# Altium PCB PowerBoard.PcbDoc
Units mm, origin at the board's own origin, x right, y up, seen from the top; angles counter-clockwise.
Board outline 27.18 x 30.35 mm, 2 copper layers (Top Layer, Bottom Layer); 15 components, 9 nets, 30 pads, 2 vias.
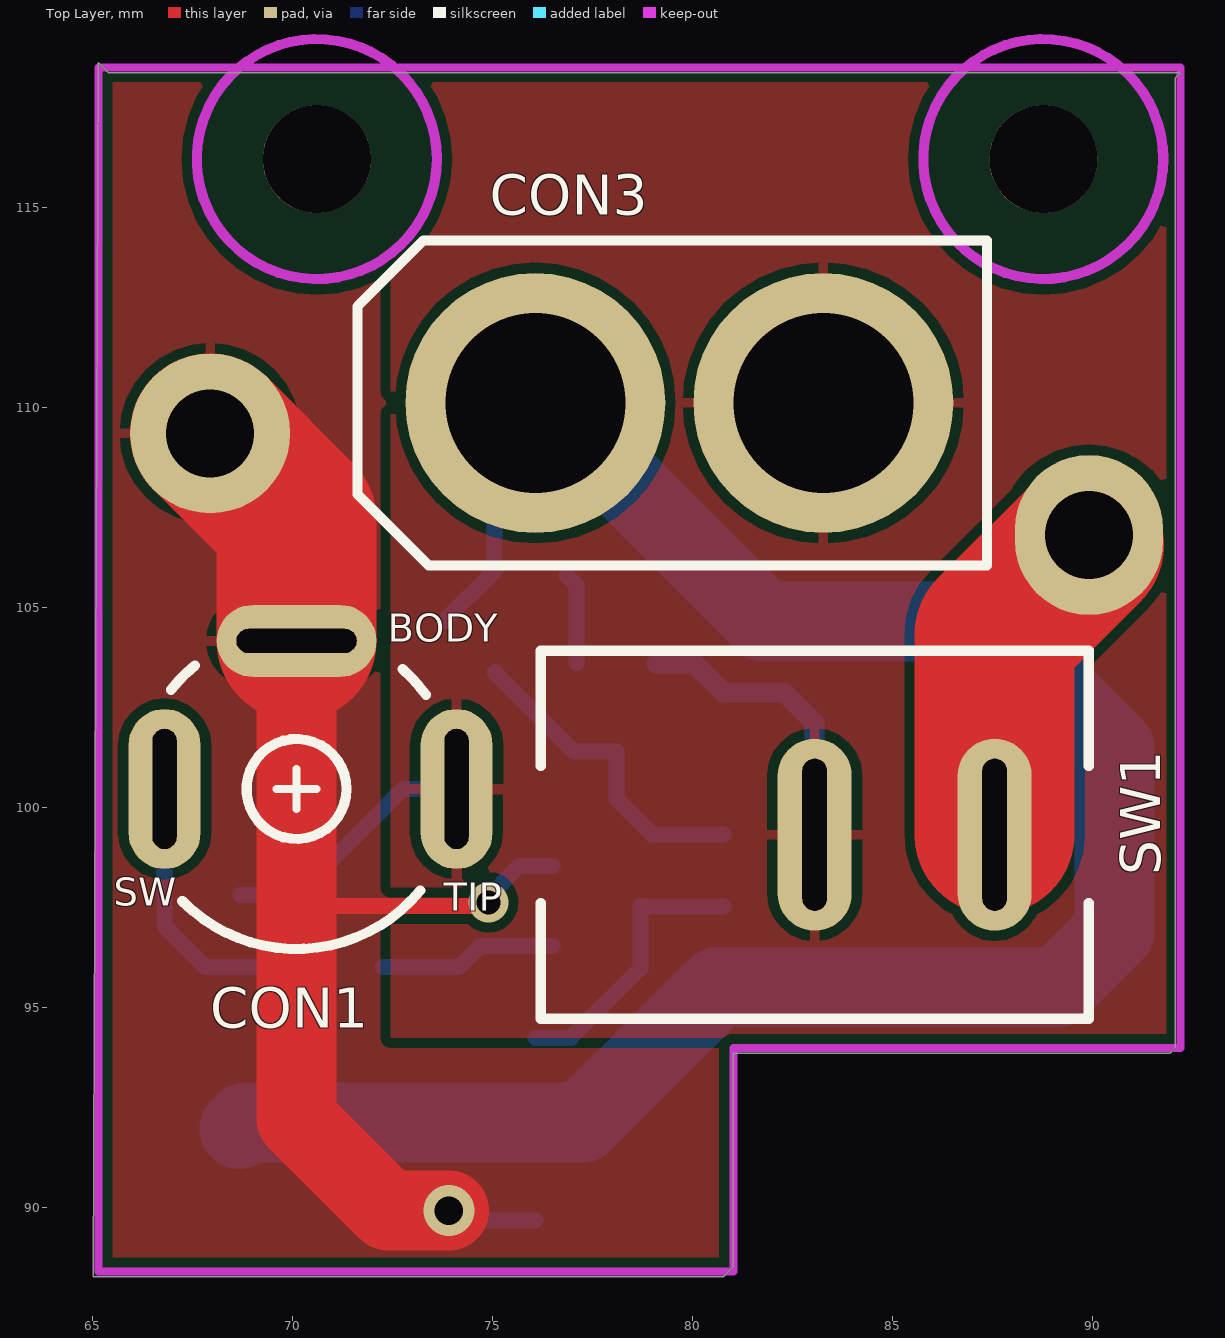
[diagram p0: Top Layer view]
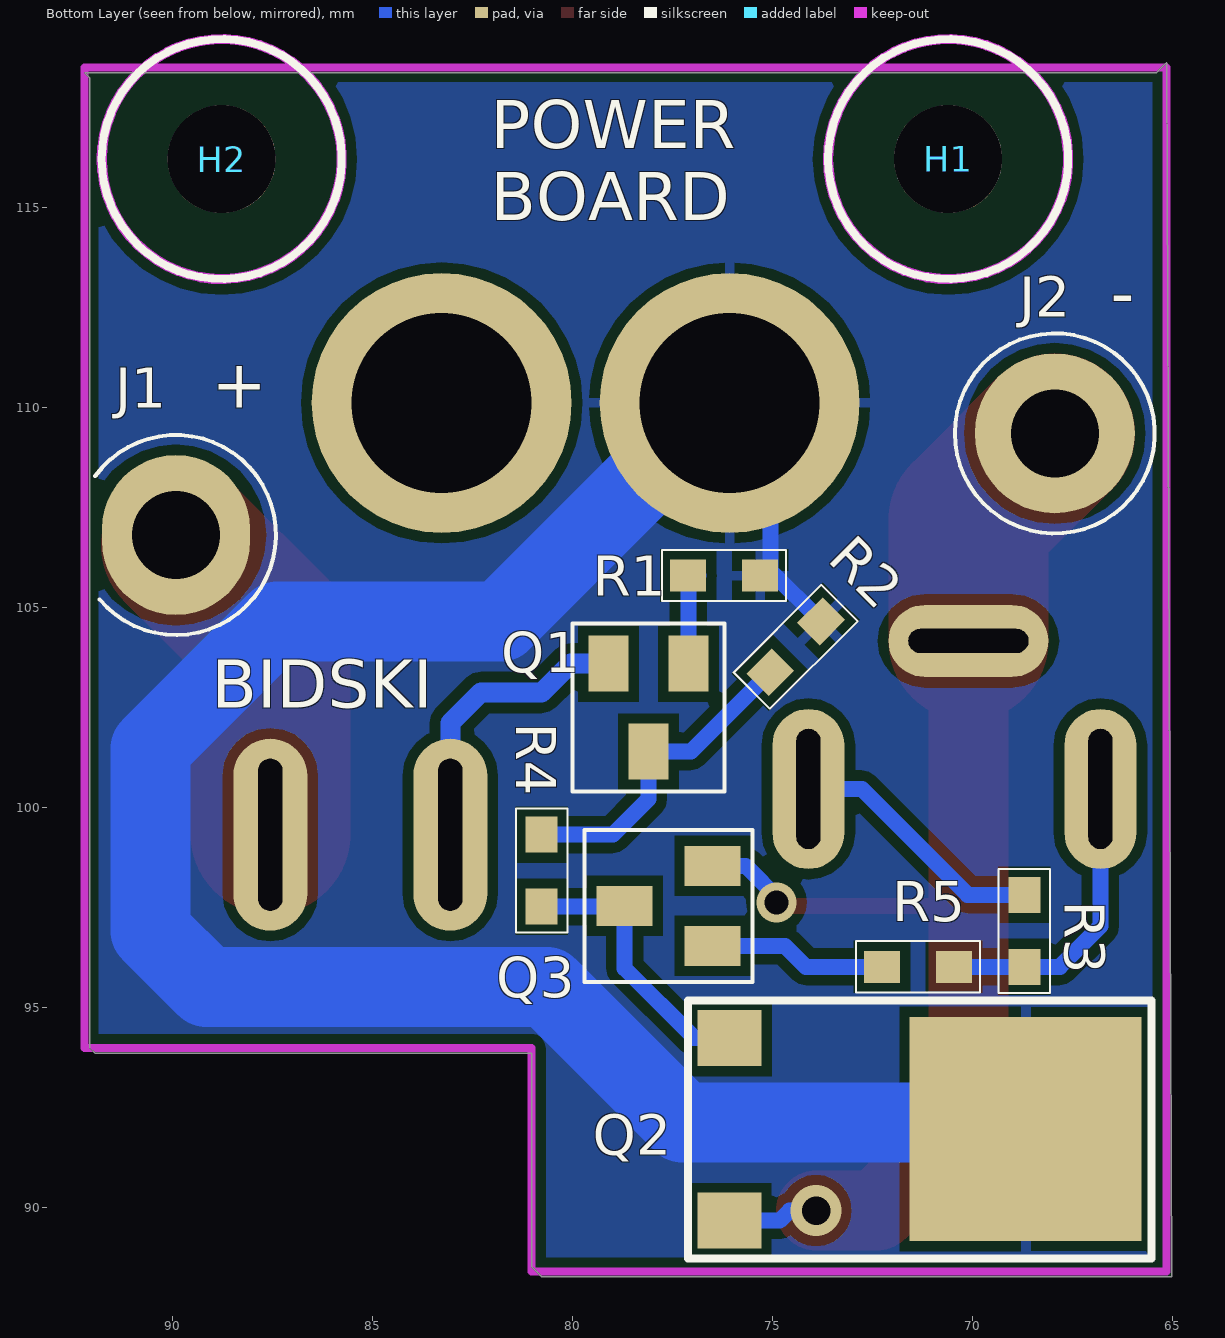
[diagram p1: Bottom Layer view, seen from below]

## Layer stack, top to bottom
Top Solder: solder mask 0.0102, Solder Resist, Dk 3.5
Top Layer: signal copper 0.0356
Dielectric 1: dielectric 0.32, FR-4, Dk 4.8
Bottom Layer: signal copper 0.0356
Bottom Solder: solder mask 0.0102, Solder Resist, Dk 3.5

## Board outline
65.151,118.618 65.405,118.364 92.202,118.364 92.075,118.237 92.075,93.98 91.948,93.853 81.026,93.853 81.026,88.519 80.772,88.265 65.024,88.265

## Design rules (kind name [scope] priority, off if disabled: settings)
Clearance [All] p1: gap=0.254
ComponentClearance [All] p1: gap=0.254 collisioncheckmode=3 verticalgap=0.254 showdistances=TRUE
HoleSize [All] p1: absolutevalues=TRUE maxlimit=5.08 minlimit=0.025 maxpercent=80.000 minpercent=20.000
PolygonConnect [All] p1: connectstyle=Relief reliefconductorwidth=0.254 reliefentries=4 polygonreliefangle="90 Angle" airgapwidth=0.254
RoutingVias [All] p1: holewidth=0.711 width=1.27 viastyle="Through Hole" minholewidth=0.711 minwidth=1.27 maxholewidth=0.711 maxwidth=1.27
SMDNeckDown VDDNeckDown [InNet('VDD')] p1: percent=50.000
SMDNeckDown GNDNeckDown [InNet('GND')] p2: percent=75.000
SMDNeckDown BGNDNeckDown [InNet('BGND')] p3: percent=50.000
SilkToSolderMaskClearance [IsPad] p1: minsilkscreentomaskgap=0.127 clearancetoexposedcopper=TRUE
SolderMaskExpansion [All] p1: expansion=0.102
Width Power [InNetClass('VDD')] p1: maxlimit=4 minlimit=0.2 preferedwidth=1.5
Width GND [InNet('GND')] p2: maxlimit=4 minlimit=0.2 preferedwidth=1.5
Width BGND [InNet('BGND')] p3: maxlimit=4 minlimit=0.2 preferedwidth=1.5
Width [All] p4: maxlimit=1 minlimit=0.2 preferedwidth=0.4
27 further rules are at their usual default settings.

## Classes and differential pairs
net class VDD: BGND GND NetJ1_1 VDD

## Components (designator, comment, footprint, x,y, rotation, side; value= is the part's Value field where it differs from the comment)
CON1 "MAINS" PCB-DC-SOCKET 70.104,100.457 r180 top locked
CON3 "XT60" CON-XT60 76.073,110.109 r0 top locked
H1 "Fixing" HW-FIXING-2.5MM-PLASTIC 70.612,116.205 r180 bottom locked
H2 "Fixing" HW-FIXING-2.5MM-PLASTIC 88.773,116.205 r180 bottom locked
J1 "+" TESTPOINT(LB)#1 89.916,106.807 r180 bottom
J2 "-" TESTPOINT(LB)#2 67.945,109.347 r180 bottom
Q1 "MMBT2907" SOT-23(LB) 78.105,102.489 r0 bottom
Q2 "IRLR7833" TO-252(LB) 76.073,94.234 r270 bottom
Q3 "MMBT2222" SOT-23(LB) 77.597,97.536 r90 bottom
R1 "0603" 0603(LB) 75.311,105.791 r0 bottom
R2 "0603" 0603(LB) 73.787,104.648 r315 bottom
R3 "0603" 0603(LB) 68.707,96.012 r90 bottom
R4 "0603" 0603(LB) 80.772,97.515 r90 bottom
R5 "0603" 0603(LB) 72.263,96.012 r180 bottom
SW1 "ON/OFF" PCB-SWSPDT-ROCKER 83.058,99.314 r0 top locked

## Footprints (in the part's own frame and the unit in brackets; to place one, negate y for a bottom-side part, rotate by r counter-clockwise, add the part's x,y. Pads: shape width x height; smd on the part's side, far side on the other; paste and mask are expansions set on the pad)
0603(LB) [mm]
  rect 0.9x0.8 smd: 1(0,0) 2(1.8,0)
  silkscreen extent -0.65,-0.64 2.45,0.64
CON-XT60 [mm] "XT60 Battery Connector"
  round 6.5 hole 4.5: 1(0,0) 2(7.2,0)
  silkscreen extent -4.44,-4.06 11.29,4.06
HW-FIXING-2.5MM-PLASTIC [mm] "Mounting point for a 2.5mm plastic pillar"
  round 2.7 hole 2.7 unplated paste+0 mask+0: 1(0,0)
  Keep-Out Layer circle w0.254: c0,0 r3
  silkscreen extent -3,-3 3,3
PCB-DC-SOCKET [mm]
  oval 1.8x4 hole 0.6 slot 3 at 90 deg: 1(-4,0) 2(3.3,0)
  oval 4x1.8 hole 0.6 slot 3 at 0 deg: 3(0,-3.7)
  silkscreen extent -3.23,-3.09 3.14,4
PCB-SWSPDT-ROCKER [mm] "Mains SPST rocker switch"
  oval 1.85x4.8 hole 0.61 slot 3.8 at 90 deg: 1(0,0) 2(4.5,0)
  silkscreen extent -6.85,-4.6 6.85,4.6
SOT-23(LB) [mm]
  rect 1x1.4 smd: 1(-1,-1.1) 2(1,-1.1) 3(0,1.1)
  silkscreen extent -1.9,-2.1 1.9,2.1
TESTPOINT(LB)#1 [mm]
  oval 3.7x4 hole 2.2: 1(0,0)
  silkscreen extent -2.02,-2.5 2.5,2.5
TESTPOINT(LB)#2 [mm]
  round 4 hole 2.2: 1(0,0)
  silkscreen extent -2.5,-2.5 2.5,2.5
TO-252(LB) [mm]
  rect 1.4x1.6 smd: 1(0,0) 2(4.57,0)
  rect 5.6x5.8 smd: 3(2.28,7.4)
  silkscreen extent -0.94,-1.04 5.51,10.54

## Part data
CON1: library part DC2.5MM-PCBV(LB), "Switched 2.5mm DC Connector - PCB"
CON3: "XT60 Connector"
H1 H2: library part HW-FIXING-ISOLATED(LB), "M3/M4 Fixing Hole"
J1 J2: library part CON1(LB)
Q1: library part MMBT2907(SMD), "PNP Transistor"
Q2: library part IRLR7833(LB)
Q3: library part MMBT2222(SMD), "NPN Transistor"
R1 R2 R3 R4 R5: library part Res3, "Resistor"
SW1: library part SW-SPST(LB), "Single-pole Single-throw Switch"

## Via types
v1: diameter 1, hole 0.6, Top Layer to Bottom Layer, tented both sides, 1 vias
v2: diameter 1.27, hole 0.711, Top Layer to Bottom Layer, 1 vias

## Nets (pads, with @x,y where several pads share a name; then routed paths per layer and width w, separated by ;. In a path a pad name is that pad's centre, name@x,y a point inside that pad or via, vN(x,y) a via of type N, cw(c..) or ccw(c..) an arc to the next point about the centre after c; other vN are vias at no path point)
BGND: CON3.1 Q2.3 R1.1 R2.1 | length 52
  Bottom Layer w0.4: R2.1 75.057,105.918 CON3.1@75.057,109.093
  Bottom Layer w1.5: CON3.1@75.057,109.093 CON3.1
  Bottom Layer w2: Q2.3 68.842,92.123 77.254,92.123 80.635,95.504 89.154,95.504 90.551,96.901 90.551,101.473 87.376,104.648 81.788,104.648 CON3.1@76.807,109.629
GND: CON1.3 J2.1 Q2.2 Q3.2 | length 31.8
  Top Layer w0.4: 70.104,97.536 74.813,97.536 v1(74.902,97.625)
  Top Layer w2: CON1.3@70.104,103.886 70.104,97.536 70.104,92.202 72.39,89.916 v2(73.914,89.916)
  Top Layer w4: J2.1 70.104,107.188 CON1.3
  Bottom Layer w0.4: v2(73.914,89.916) 74.574,89.916 74.826,89.664 Q2.2 ; v1(74.902,97.625) 74.841,97.625 74.803,97.663 75.676,98.536 Q3.2
NetCON1_2: CON1.2 R3.1 R5.2 | length 7.5
  Bottom Layer w0.4: CON1.2 66.804,97.026 67.818,96.012 R3.1 R5.2
NetJ1_1: J1.1 SW1.2 | length 8.2
  Top Layer w4: SW1.2 87.558,104.322 J1.1@89.789,106.553
NetQ1_1: Q1.1 R1.2 | length 2.3
  Bottom Layer w0.4: R1.2@76.857,105.791 77.105,105.543 Q1.1@77.105,103.61
NetQ1_3: Q1.3 R2.2 R4.2 | length 8.1
  Bottom Layer w0.4: R2.2 77.046,101.389 Q1.3 78.105,100.203 78.993,99.315 R4.2
NetQ2_1: Q2.1 Q3.3 R4.1 | length 7
  Bottom Layer w0.4: Q2.1 76.962,94.234 78.697,95.969 Q3.3 78.719,97.515 R4.1
NetQ3_1: Q3.1 R5.1 | length 4.5
  Bottom Layer w0.4: R5.1 74.168,96.012 74.692,96.536 Q3.1
VDD: CON1.1 CON3.2 Q1.2 R3.2 SW1.1 | length 15.3
  Top Layer w1.5: SW1.1 SW1.1@83.058,100.457 ; CON3.2@83.058,109.894 CON3.2
  Bottom Layer w0.4: R3.2 70.126,97.812 72.771,100.457 CON1.1
  Bottom Layer w0.5: Q1.2 80.053,103.589 80.772,102.87 82.296,102.87 83.058,102.108 SW1.1
pads on no net: H1.1 H2.1

## Polygon pours and split planes (outlines as drawn)
VDD on Top Layer "Top Layer-No Net" (solid, remove dead copper, pour order 15): 92.202,118.491 92.202,94.234 72.453,94.234 72.453,118.618
GND on Top Layer "Top Layer-No Net" (solid, remove dead copper, pour order 17): 65.151,118.491 92.202,118.491 92.71,117.983 92.71,88.265 92.583,88.392 65.151,88.392
BGND on Bottom Layer "Top Layer-No Net" (solid, remove dead copper, pour order 19): 65.151,118.491 64.897,118.237 64.897,88.392 65.278,88.011 92.837,88.011 92.202,88.646 92.202,118.491

## Keep-outs
Keep-Out Layer:
  lines w0.2: 65.151,88.392 65.151,118.491 92.202,118.491 92.202,93.98 81.026,93.98 81.026,88.392 65.151,88.392

## Silkscreen, mask and mechanical layers (free items; w line width, h text height)
Bottom Overlay:
  text "POWER / BOARD" at 82.042,114.681 h1.2
  text "BIDSKI" at 89.027,102.489 h1.2
Board Outline:
  lines w0.254: 65.151,88.392 81.026,88.392 81.026,93.98 92.202,93.98 92.202,118.491 65.151,118.491 65.151,88.392

## Text inside footprints (layer, text, board x,y; h text height)
CON1: Top Overlay "BODY" at 72.39,104.14 h0.7; Top Overlay "SW" at 65.532,97.536 h0.7; Top Overlay "TIP" at 73.787,97.409 h0.7